# EAGLE board eib-128_panel (EAGLE 6.5.0), part 1 of 6
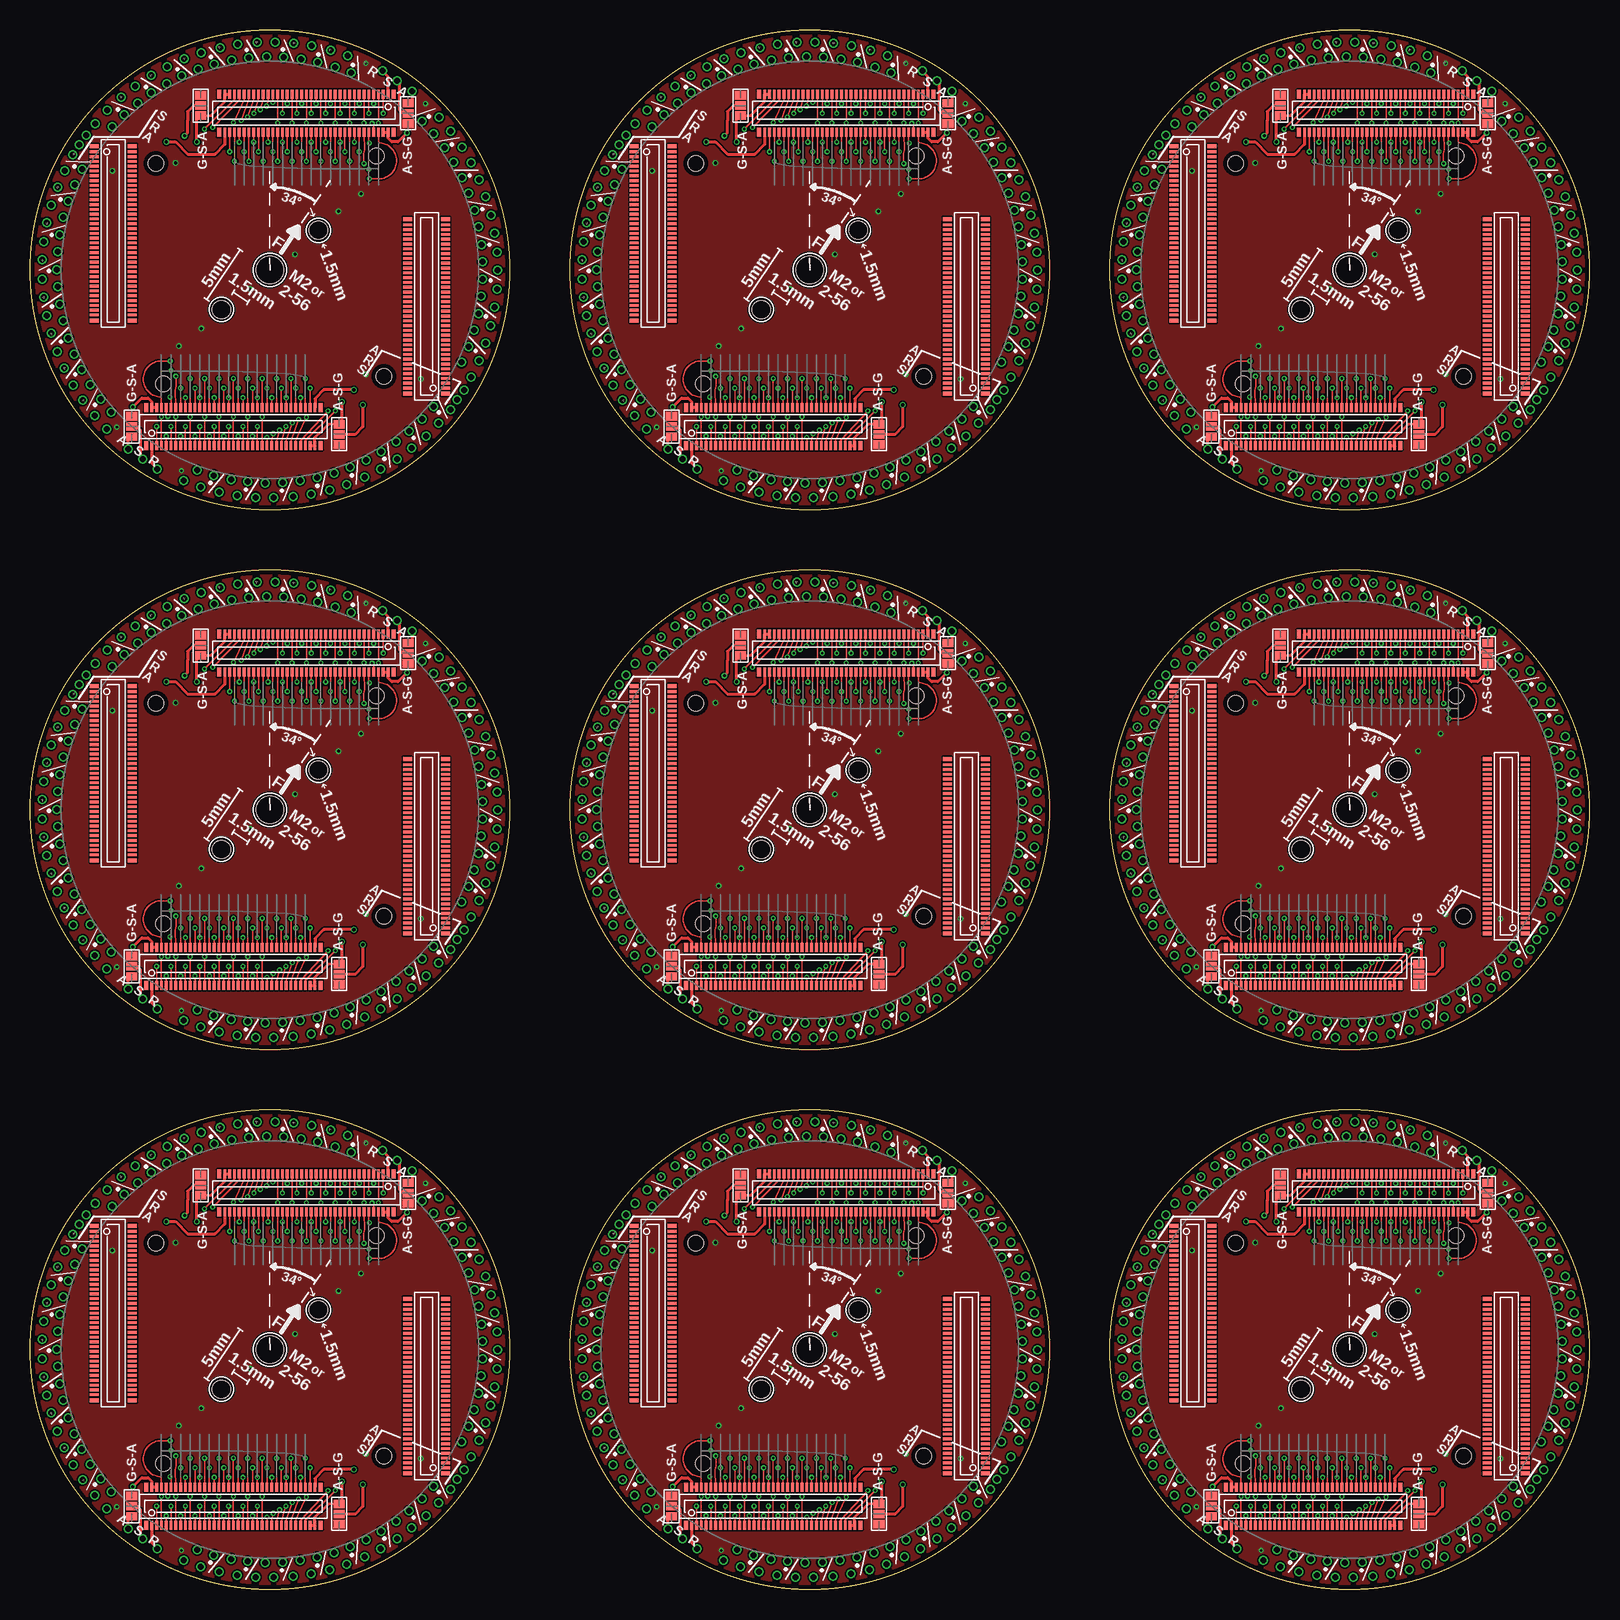
[diagram p0: board, top side]
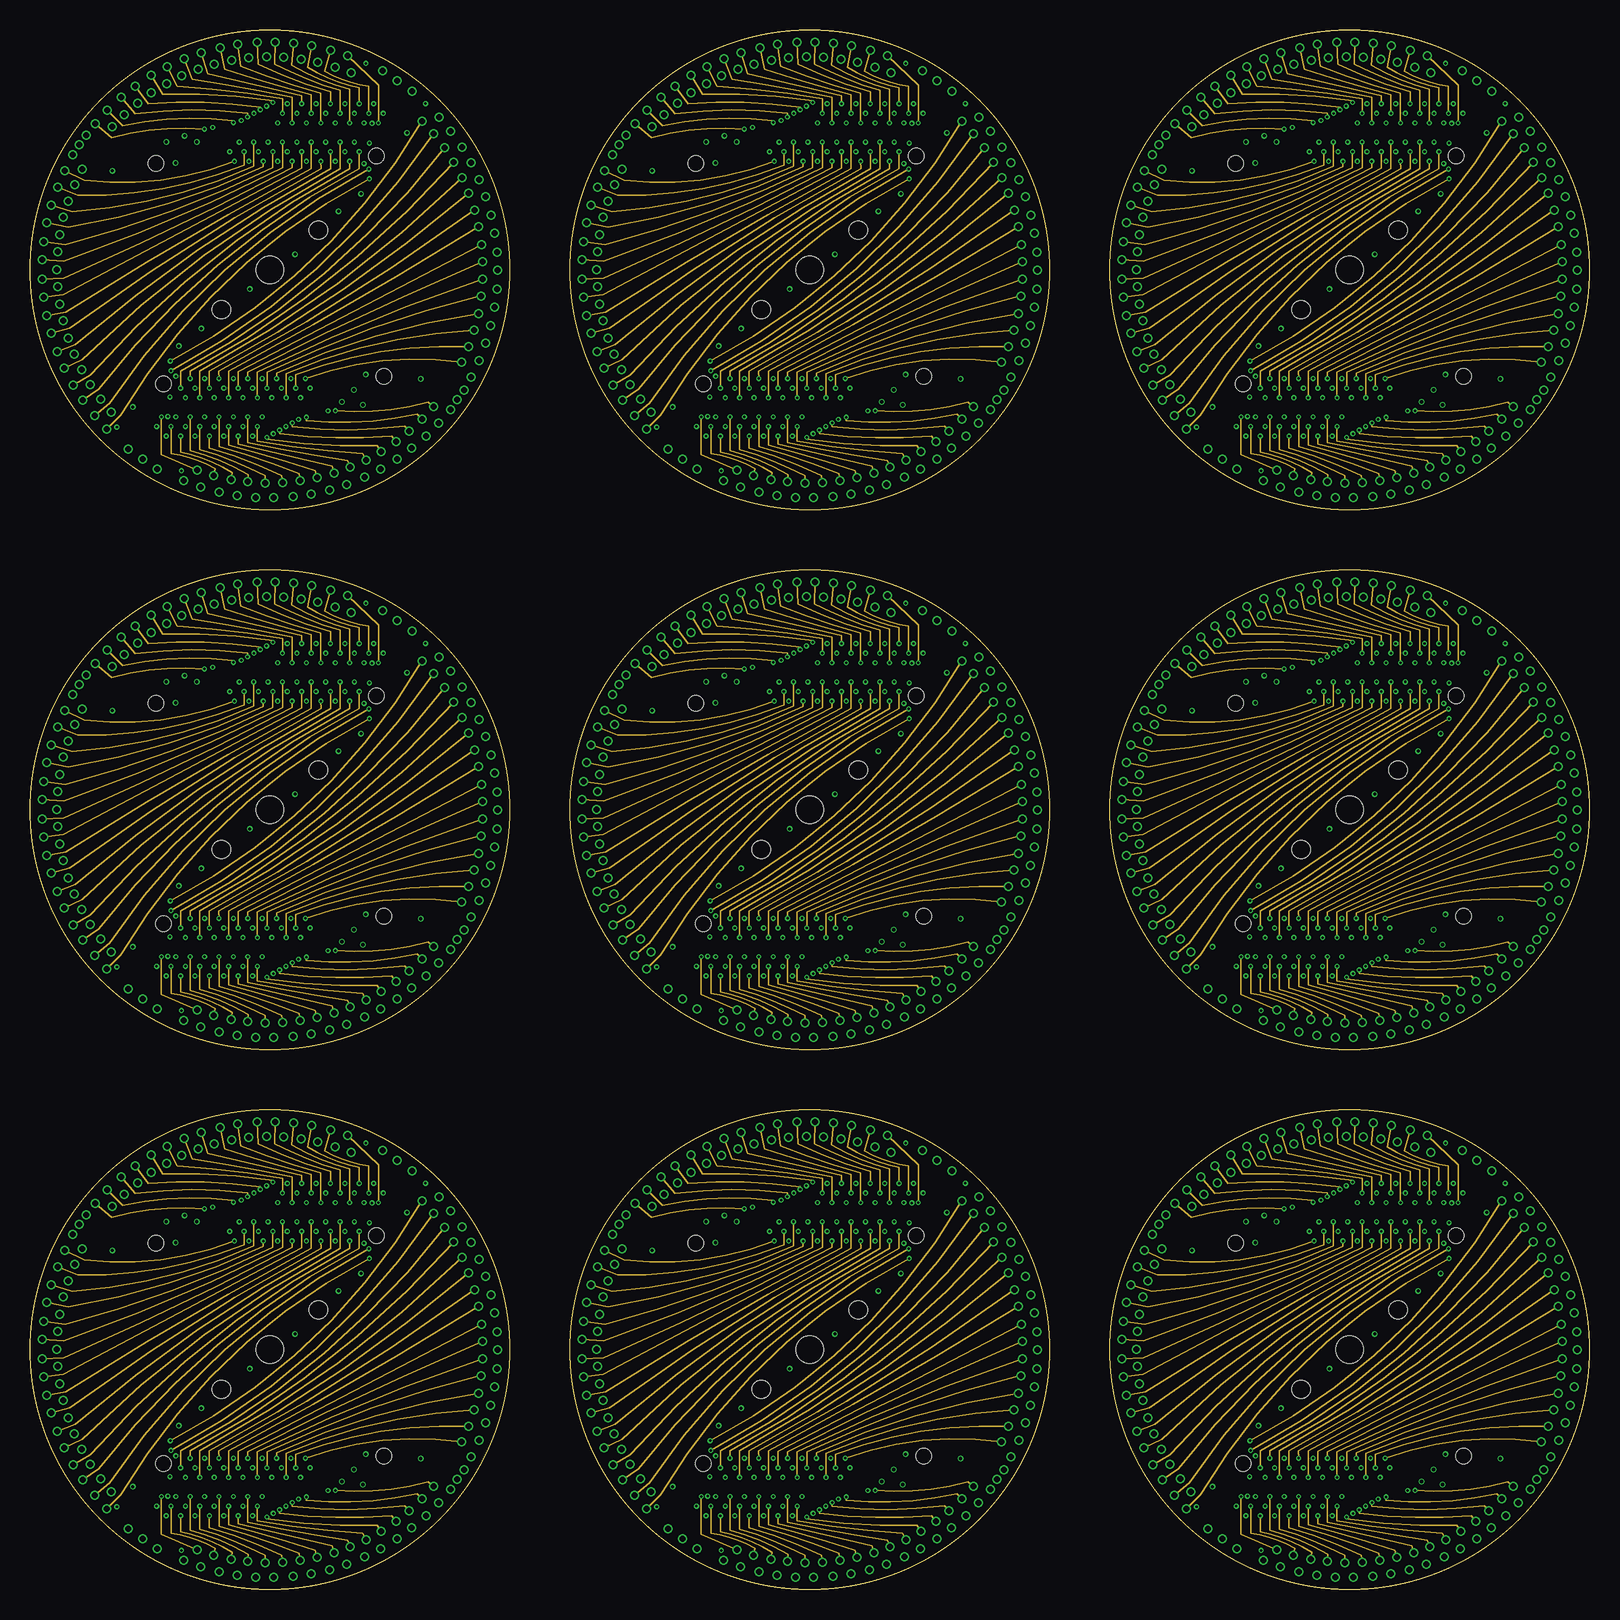
[diagram p1: board, inner layer Route2]
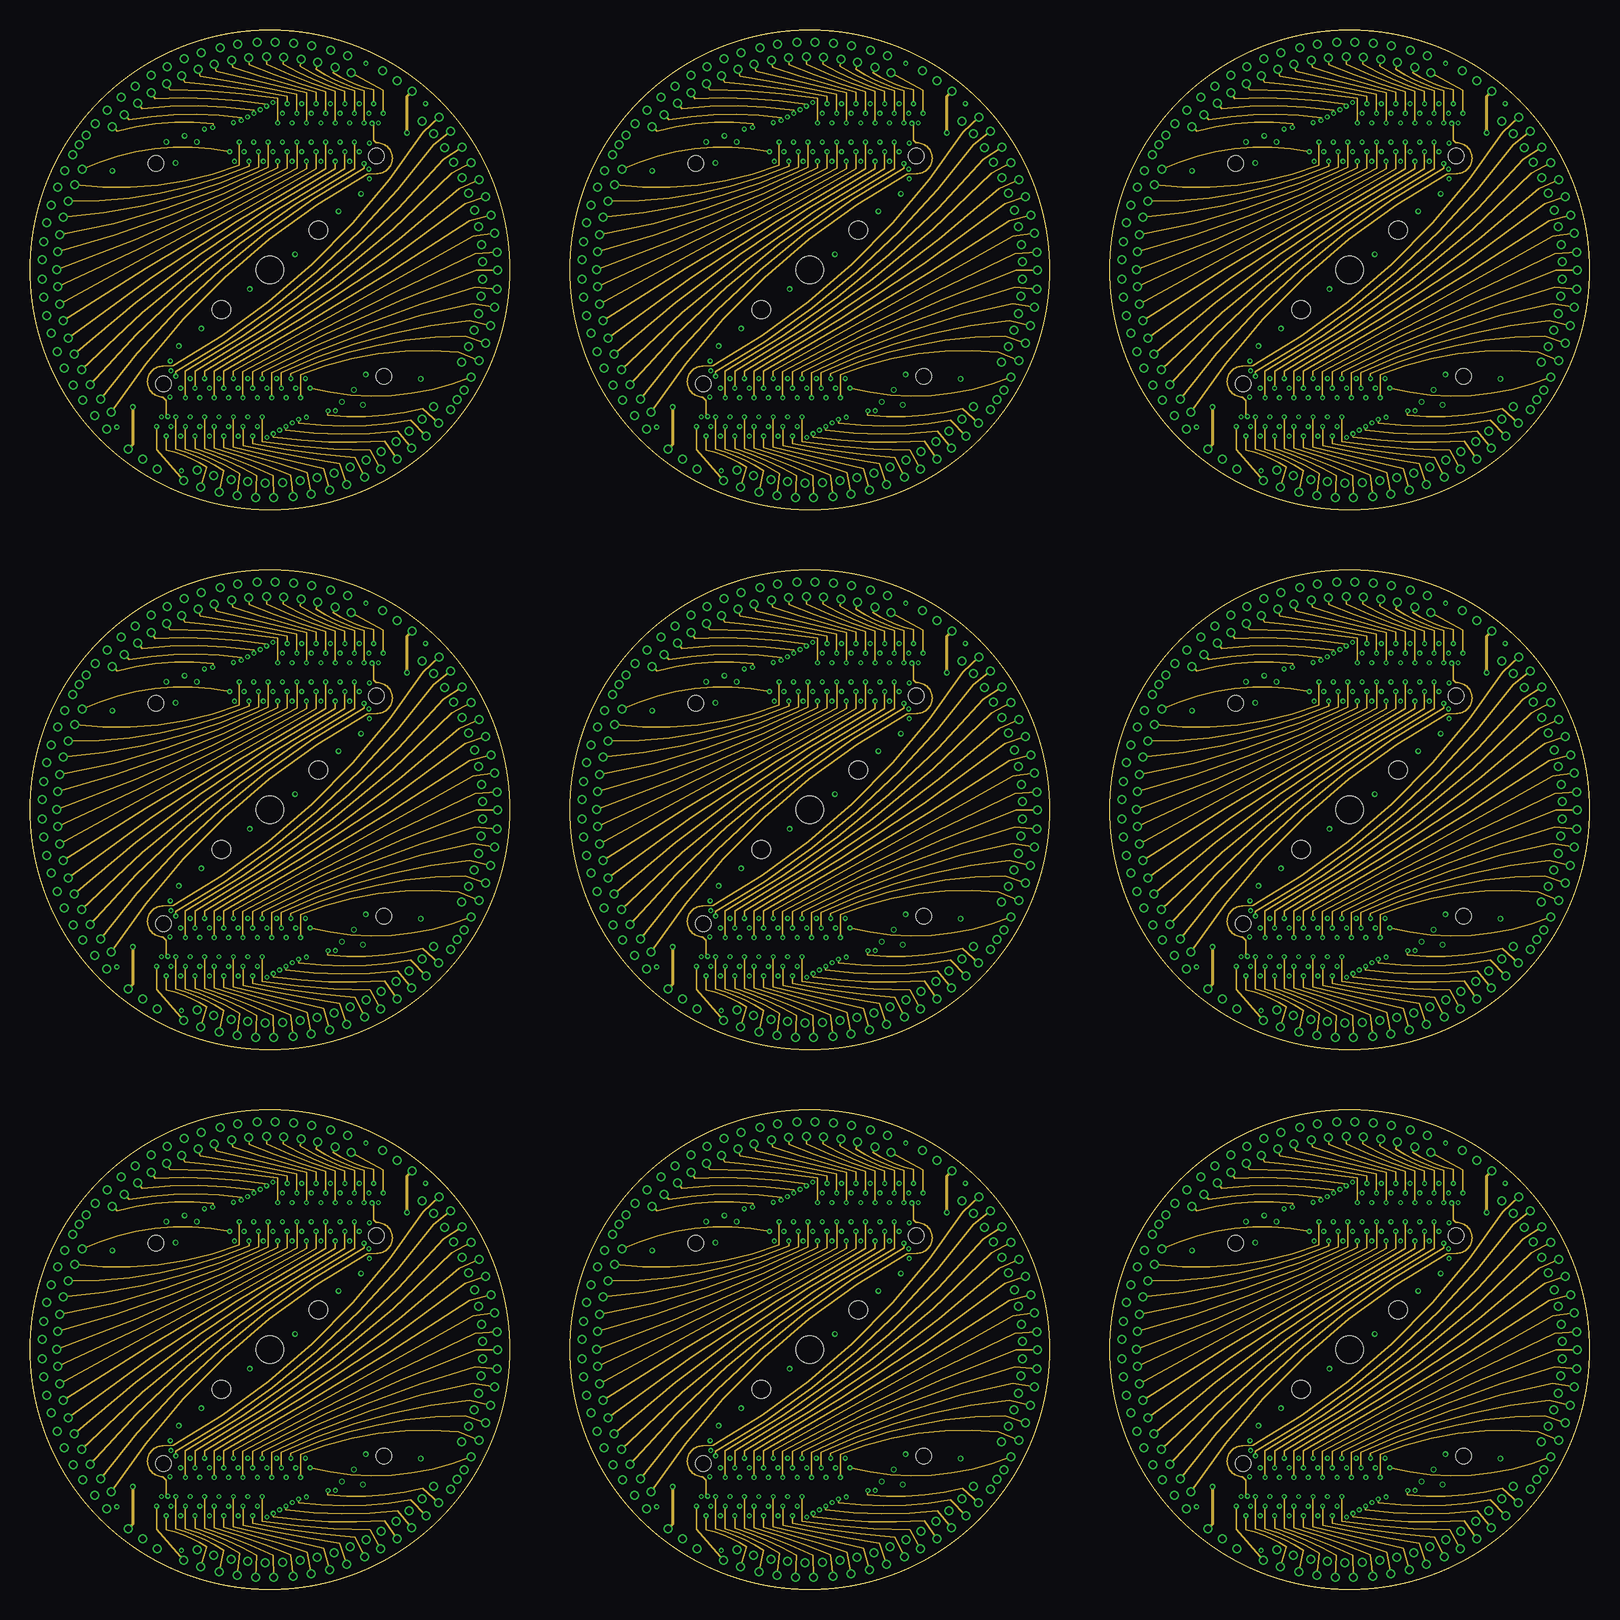
[diagram p2: board, inner layer Route15]
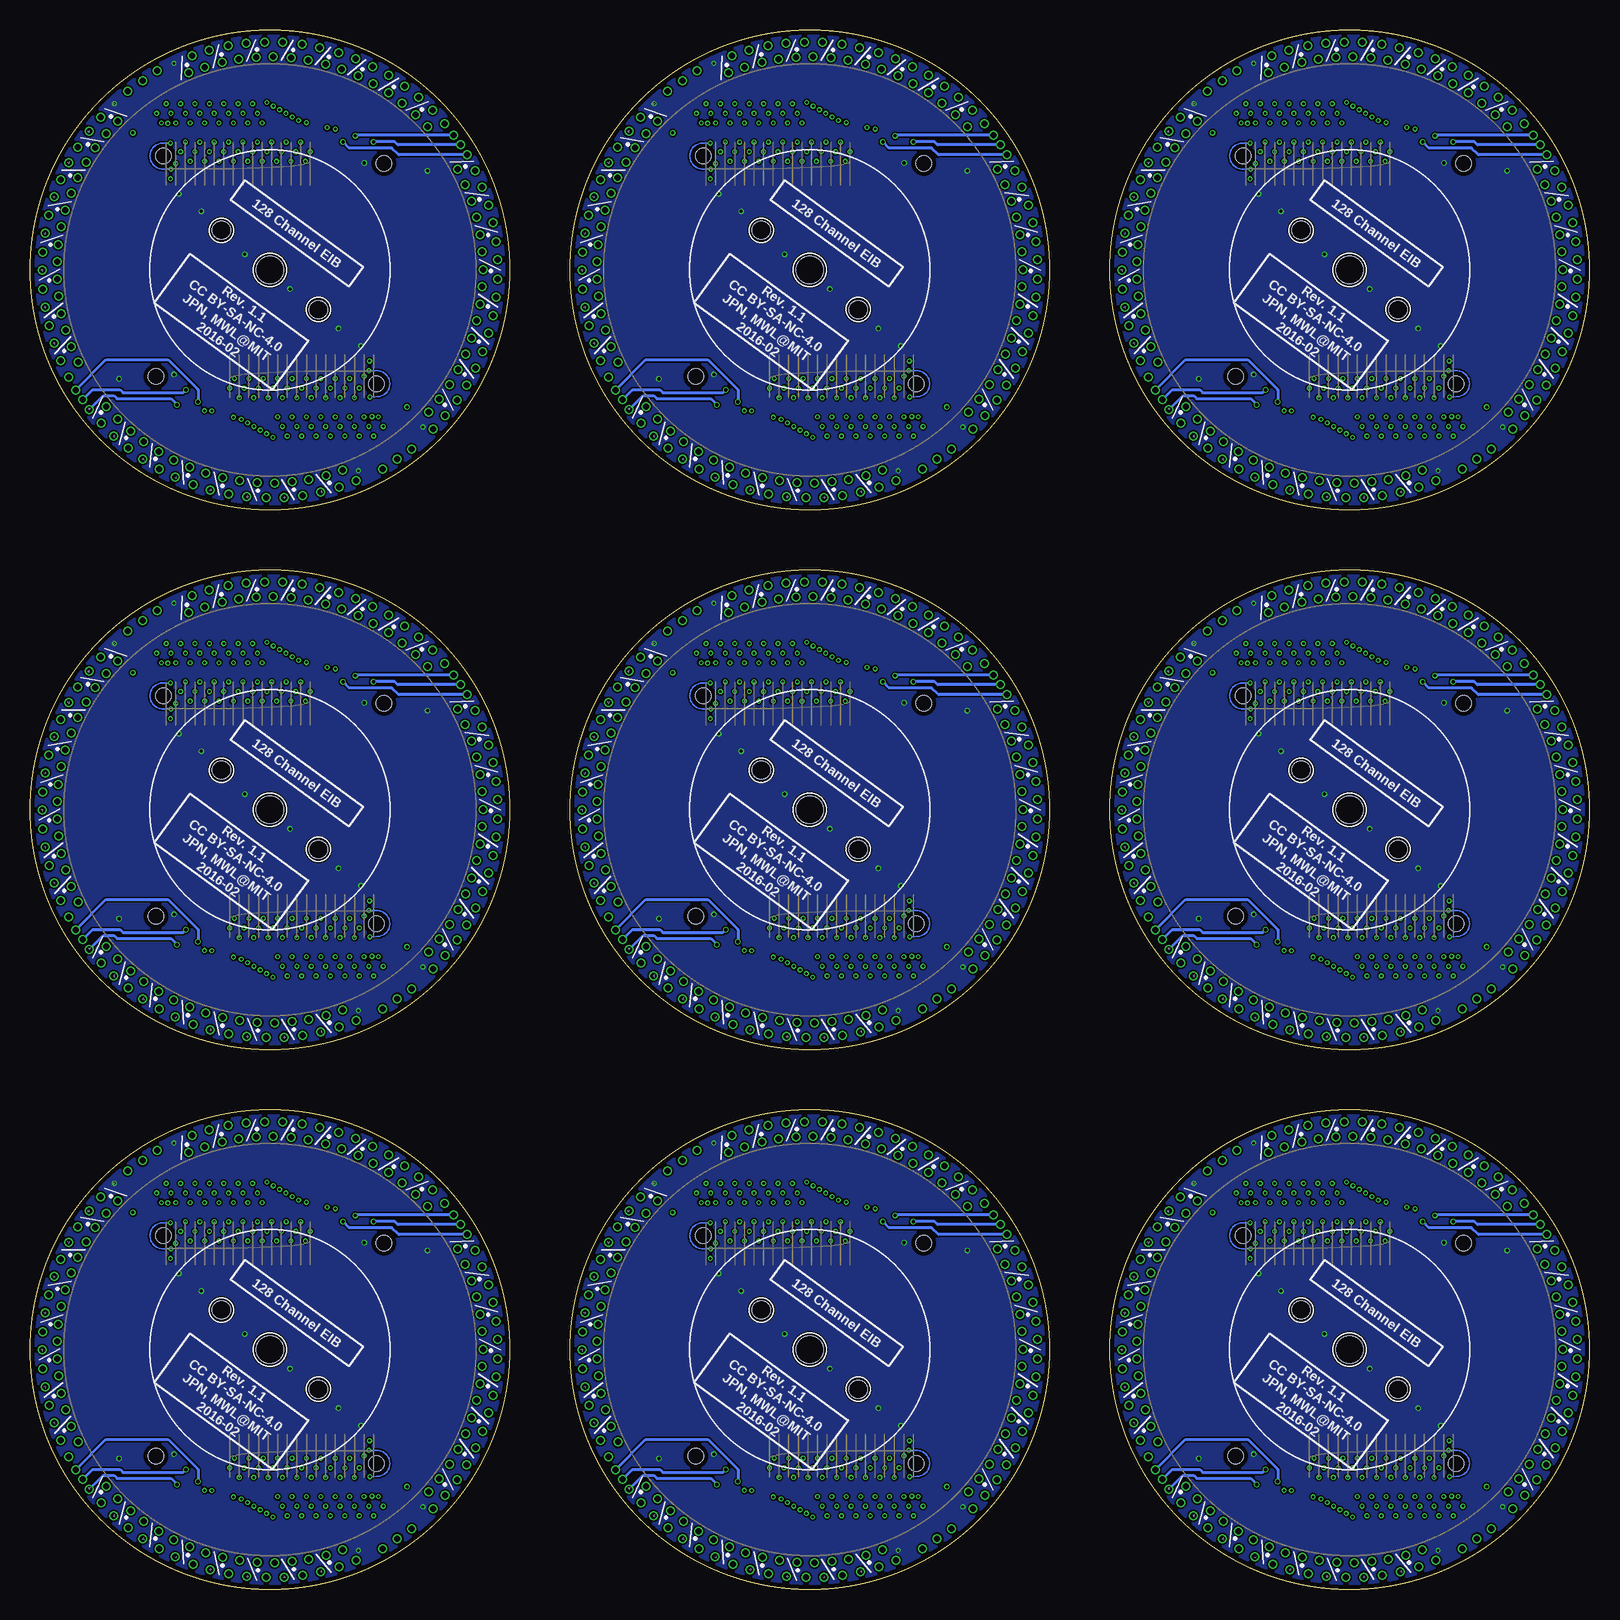
[diagram p3: board, bottom side, seen from below]

Size 130 x 130 mm. Coordinates in mm from the lower left corner, seen from the top.
Outline: circle at 20,20 radius 20
Outline: circle at 20,20 radius 20
Outline: circle at 65,20 radius 20
Outline: circle at 65,20 radius 20
Outline: circle at 110,20 radius 20
Outline: circle at 110,20 radius 20
Outline: circle at 20,65 radius 20
Outline: circle at 20,65 radius 20
Outline: circle at 65,65 radius 20
Outline: circle at 65,65 radius 20
Outline: circle at 110,65 radius 20
Outline: circle at 110,65 radius 20
Outline: circle at 20,110 radius 20
Outline: circle at 20,110 radius 20
Outline: circle at 65,110 radius 20
Outline: circle at 65,110 radius 20
Outline: circle at 110,110 radius 20
Outline: circle at 110,110 radius 20
Copper layers (1*2*15*16): Top 0.035559375mm / dielectric 0.17018125mm / Route2 0.01778125mm / dielectric 47mil / Route15 0.01778125mm / dielectric 0.17018125mm / Bottom 0.035559375mm
Design rules "sierra-circuits-advanced *": minimum track width 5mil, minimum drill 0.0078mm, track to track 5mil, track to pad 5mil, pad to pad 5mil, via to via 5mil, smd to smd 5mil, copper to edge 15mil, drill to drill 5mil, minimum pad ring 4mil, minimum via ring 4mil, stop-mask expansion 4mil, vias tented up to drill 100mil, thermal gap 10mil
Net classes: 1 thick: width 0.102 mm
Holes 1.27 mm at 28.89,29.5 29.5,11.11 11.11,10.5 10.5,28.89 73.89,29.5 74.5,11.11 56.11,10.5 55.5,28.89 118.89,29.5 119.5,11.11 101.11,10.5 100.5,28.89 28.89,74.5 29.5,56.11 11.11,55.5 10.5,73.89 73.89,74.5 74.5,56.11 56.11,55.5 55.5,73.89 118.89,74.5 119.5,56.11 101.11,55.5 100.5,73.89 28.89,119.5 29.5,101.11 11.11,100.5 10.5,118.89 73.89,119.5 74.5,101.11 56.11,100.5 55.5,118.89 118.89,119.5 119.5,101.11 101.11,100.5 100.5,118.89

## Footprints (pad centres in the part's own frame; a part is rotated, then mirrored left to right if it is on the bottom)
GOLDPIN_0.5ID_0.7OD = drill 0.5 pad 0.7: P$1 0,0
DF40-70HEAD-EIB = smd 0.23 x 0.75: 1 -6.8,-1.585; 2 -6.4,-1.585; 3 -6,-1.585; 4 -5.6,-1.585; 5 -5.2,-1.585; 6 -4.8,-1.585; 7 -4.4,-1.585; 8 -4,-1.585; 9 -3.6,-1.585; 10 -3.2,-1.585; 11 -2.8,-1.585; 12 -2.4,-1.585; 13 -2,-1.585; 14 -1.6,-1.585; 15 -1.2,-1.585; 16 -0.8,-1.585; 17 -0.4,-1.585; 18 0,-1.585; 19 0.4,-1.585; 20 0.8,-1.585; 21 1.2,-1.585; 22 1.6,-1.585; 23 2,-1.585; 24 2.4,-1.585; 25 2.8,-1.585; 26 3.2,-1.585; 27 3.6,-1.585; 28 4,-1.585; 29 4.4,-1.585; 30 4.8,-1.585; 31 5.2,-1.585; 32 5.6,-1.585; 33 6,-1.585; 34 6.4,-1.585; 35 6.8,-1.585; 36 6.8,1.585; 37 6.4,1.585; 38 6,1.585; 39 5.6,1.585; 40 5.2,1.585; 41 4.8,1.585; 42 4.4,1.585; 43 4,1.585; 44 3.6,1.585; 45 3.2,1.585; 46 2.8,1.585; 47 2.4,1.585; 48 2,1.585; 49 1.6,1.585; 50 1.2,1.585; 51 0.8,1.585; 52 0.4,1.585; 53 0,1.585; 54 -0.4,1.585; 55 -0.8,1.585; 56 -1.2,1.585; 57 -1.6,1.585; 58 -2,1.585; 59 -2.4,1.585; 60 -2.8,1.585; 61 -3.2,1.585; 62 -3.6,1.585; 63 -4,1.585; 64 -4.4,1.585; 65 -4.8,1.585; 66 -5.2,1.585; 67 -5.6,1.585; 68 -6,1.585; 69 -6.4,1.585; 70 -6.8,1.585 | smd 0.35 x 0.75: M1 -7.275,-1.585; M2 7.275,-1.585; M3 7.275,1.585; M4 -7.275,1.585 | drill 0.2 pad 0.305: P2 -6.4,0; P3 -6,0.8; P4 -5.6,-0.8; P5 -5.2,0; P6 -4.8,0.8; P7 -4.4,-0.8; P8 -4,0; P9 -3.6,0.8; P10 -3.2,-0.8; P11 -2.8,0; P12 -2.4,0.8; P13 -2,-0.8; P14 -1.6,0; P15 -1.2,0.8; P16 -0.8,-0.8; P17 -0.4,0; P18 0,0.8; P19 0.4,-0.8; P20 0.8,0; P21 1.2,0.8; P22 1.6,-0.8; P23 2,0; P24 2.4,0.8; P25 2.8,-0.9; P26 3.327,-0.6; P27 3.854,-0.3; P28 4.381,0; P29 4.908,0.3; P30 5.435,0.6; P31 6.089,0.773; P37 6.4,3.2; P38 6,4; P39 5.6,2.4; P40 5.2,3.2; P41 4.8,4; P42 4.4,2.4; P43 4,3.2; P44 3.6,4; P45 3.2,2.4; P46 2.8,3.2; P47 2.4,4; P48 2,2.4; P49 1.6,3.2; P50 1.2,4; P51 0.8,2.4; P52 0.4,3.2; P53 0,4; P54 -0.4,2.4; P55 -0.8,3.2; P56 -1.2,4; P57 -1.6,2.4; P58 -2,3.2; P59 -2.4,4; P60 -2.8,2.4; P61 -3.2,3.2; P62 -3.6,4; P63 -4,2.4; P64 -4.4,3.2
DF40-70HEAD = smd 0.23 x 0.75: 1 -6.8,-1.585; 2 -6.4,-1.585; 3 -6,-1.585; 4 -5.6,-1.585; 5 -5.2,-1.585; 6 -4.8,-1.585; 7 -4.4,-1.585; 8 -4,-1.585; 9 -3.6,-1.585; 10 -3.2,-1.585; 11 -2.8,-1.585; 12 -2.4,-1.585; 13 -2,-1.585; 14 -1.6,-1.585; 15 -1.2,-1.585; 16 -0.8,-1.585; 17 -0.4,-1.585; 18 0,-1.585; 19 0.4,-1.585; 20 0.8,-1.585; 21 1.2,-1.585; 22 1.6,-1.585; 23 2,-1.585; 24 2.4,-1.585; 25 2.8,-1.585; 26 3.2,-1.585; 27 3.6,-1.585; 28 4,-1.585; 29 4.4,-1.585; 30 4.8,-1.585; 31 5.2,-1.585; 32 5.6,-1.585; 33 6,-1.585; 34 6.4,-1.585; 35 6.8,-1.585; 36 6.8,1.585; 37 6.4,1.585; 38 6,1.585; 39 5.6,1.585; 40 5.2,1.585; 41 4.8,1.585; 42 4.4,1.585; 43 4,1.585; 44 3.6,1.585; 45 3.2,1.585; 46 2.8,1.585; 47 2.4,1.585; 48 2,1.585; 49 1.6,1.585; 50 1.2,1.585; 51 0.8,1.585; 52 0.4,1.585; 53 0,1.585; 54 -0.4,1.585; 55 -0.8,1.585; 56 -1.2,1.585; 57 -1.6,1.585; 58 -2,1.585; 59 -2.4,1.585; 60 -2.8,1.585; 61 -3.2,1.585; 62 -3.6,1.585; 63 -4,1.585; 64 -4.4,1.585; 65 -4.8,1.585; 66 -5.2,1.585; 67 -5.6,1.585; 68 -6,1.585; 69 -6.4,1.585; 70 -6.8,1.585 | smd 0.35 x 0.75: M1 -7.275,-1.585; M2 7.275,-1.585; M3 7.275,1.585; M4 -7.275,1.585
SJ_2_0402 = smd 0.7 x 0.9: 1 -0.838,0; 2 0.838,0; COM 0,0
TETRODE_128_0.5ID_0.7OD = drill 0.5 pad 0.703: 0 0.724,17.743; 1 1.562,18.934; 2 2.14,17.628; 3 3.058,18.748
EIB_MOUNT_A = hole 2.261: 0,0 | hole 1.5: 1.5,5; -1.5,-5

## Placement (x,y rotation side)
AGND_A0  LRG_GP  [GOLDPIN_0.5ID_0.7OD]  31.87,34.91 326 top
AGND_A1  LRG_GP  [GOLDPIN_0.5ID_0.7OD]  3.55,29.59 326 top
AGND_A2  LRG_GP  [GOLDPIN_0.5ID_0.7OD]  48.55,29.59 326 top
AGND_A3  LRG_GP  [GOLDPIN_0.5ID_0.7OD]  76.87,34.91 326 top
AGND_A4  LRG_GP  [GOLDPIN_0.5ID_0.7OD]  93.55,29.59 326 top
AGND_A5  LRG_GP  [GOLDPIN_0.5ID_0.7OD]  121.87,34.91 326 top
AGND_A6  LRG_GP  [GOLDPIN_0.5ID_0.7OD]  3.55,74.59 326 top
AGND_A7  LRG_GP  [GOLDPIN_0.5ID_0.7OD]  31.87,79.91 326 top
AGND_A8  LRG_GP  [GOLDPIN_0.5ID_0.7OD]  48.55,74.59 326 top
AGND_A9  LRG_GP  [GOLDPIN_0.5ID_0.7OD]  76.87,79.91 326 top
AGND_A10  LRG_GP  [GOLDPIN_0.5ID_0.7OD]  93.55,74.59 326 top
AGND_A11  LRG_GP  [GOLDPIN_0.5ID_0.7OD]  121.87,79.91 326 top
AGND_A12  LRG_GP  [GOLDPIN_0.5ID_0.7OD]  3.55,119.59 326 top
AGND_A13  LRG_GP  [GOLDPIN_0.5ID_0.7OD]  31.87,124.91 326 top
AGND_A14  LRG_GP  [GOLDPIN_0.5ID_0.7OD]  48.55,119.59 326 top
AGND_A15  LRG_GP  [GOLDPIN_0.5ID_0.7OD]  76.87,124.91 326 top
AGND_A16  LRG_GP  [GOLDPIN_0.5ID_0.7OD]  93.55,119.59 326 top
AGND_A17  LRG_GP  [GOLDPIN_0.5ID_0.7OD]  121.87,124.91 326 top
AGND_B0  LRG_GP  [GOLDPIN_0.5ID_0.7OD]  8.17,5.06 0 top
AGND_B1  LRG_GP  [GOLDPIN_0.5ID_0.7OD]  36.17,10 0 top
AGND_B2  LRG_GP  [GOLDPIN_0.5ID_0.7OD]  53.17,5.06 0 top
AGND_B3  LRG_GP  [GOLDPIN_0.5ID_0.7OD]  81.17,10 0 top
AGND_B4  LRG_GP  [GOLDPIN_0.5ID_0.7OD]  98.17,5.06 0 top
AGND_B5  LRG_GP  [GOLDPIN_0.5ID_0.7OD]  126.17,10 0 top
AGND_B6  LRG_GP  [GOLDPIN_0.5ID_0.7OD]  8.17,50.06 0 top
AGND_B7  LRG_GP  [GOLDPIN_0.5ID_0.7OD]  36.17,55 0 top
AGND_B8  LRG_GP  [GOLDPIN_0.5ID_0.7OD]  53.17,50.06 0 top
AGND_B9  LRG_GP  [GOLDPIN_0.5ID_0.7OD]  81.17,55 0 top
AGND_B10  LRG_GP  [GOLDPIN_0.5ID_0.7OD]  98.17,50.06 0 top
AGND_B11  LRG_GP  [GOLDPIN_0.5ID_0.7OD]  126.17,55 0 top
AGND_B12  LRG_GP  [GOLDPIN_0.5ID_0.7OD]  8.17,95.06 0 top
AGND_B13  LRG_GP  [GOLDPIN_0.5ID_0.7OD]  36.17,100 0 top
AGND_B14  LRG_GP  [GOLDPIN_0.5ID_0.7OD]  53.17,95.06 0 top
AGND_B15  LRG_GP  [GOLDPIN_0.5ID_0.7OD]  81.17,100 0 top
AGND_B16  LRG_GP  [GOLDPIN_0.5ID_0.7OD]  98.17,95.06 0 top
AGND_B17  LRG_GP  [GOLDPIN_0.5ID_0.7OD]  126.17,100 0 top
AIN_N0T  DF40HEAD  [DF40-70HEAD-EIB]  23.05,33.06 180 top
AIN_N0T1  DF40HEAD  [DF40-70HEAD-EIB]  68.05,33.06 180 top
AIN_N0T2  DF40HEAD  [DF40-70HEAD-EIB]  113.05,33.06 180 top
AIN_N0T3  DF40HEAD  [DF40-70HEAD-EIB]  23.05,78.06 180 top
AIN_N0T4  DF40HEAD  [DF40-70HEAD-EIB]  68.05,78.06 180 top
AIN_N0T5  DF40HEAD  [DF40-70HEAD-EIB]  113.05,78.06 180 top
AIN_N0T6  DF40HEAD  [DF40-70HEAD-EIB]  23.05,123.06 180 top
AIN_N0T7  DF40HEAD  [DF40-70HEAD-EIB]  68.05,123.06 180 top
AIN_N0T8  DF40HEAD  [DF40-70HEAD-EIB]  113.05,123.06 180 top
AIN_S0T  DF40HEAD  [DF40-70HEAD-EIB]  16.95,6.94 0 top
AIN_S0T1  DF40HEAD  [DF40-70HEAD-EIB]  61.95,6.94 0 top
AIN_S0T2  DF40HEAD  [DF40-70HEAD-EIB]  106.95,6.94 0 top
AIN_S0T3  DF40HEAD  [DF40-70HEAD-EIB]  16.95,51.94 0 top
AIN_S0T4  DF40HEAD  [DF40-70HEAD-EIB]  61.95,51.94 0 top
AIN_S0T5  DF40HEAD  [DF40-70HEAD-EIB]  106.95,51.94 0 top
AIN_S0T6  DF40HEAD  [DF40-70HEAD-EIB]  16.95,96.94 0 top
AIN_S0T7  DF40HEAD  [DF40-70HEAD-EIB]  61.95,96.94 0 top
AIN_S0T8  DF40HEAD  [DF40-70HEAD-EIB]  106.95,96.94 0 top
MECH_E0T  DF40HEAD  [DF40-70HEAD]  33.06,16.95 90 top
MECH_E0T1  DF40HEAD  [DF40-70HEAD]  78.06,16.95 90 top
MECH_E0T2  DF40HEAD  [DF40-70HEAD]  123.06,16.95 90 top
MECH_E0T3  DF40HEAD  [DF40-70HEAD]  33.06,61.95 90 top
MECH_E0T4  DF40HEAD  [DF40-70HEAD]  78.06,61.95 90 top
MECH_E0T5  DF40HEAD  [DF40-70HEAD]  123.06,61.95 90 top
MECH_E0T6  DF40HEAD  [DF40-70HEAD]  33.06,106.95 90 top
MECH_E0T7  DF40HEAD  [DF40-70HEAD]  78.06,106.95 90 top
MECH_E0T8  DF40HEAD  [DF40-70HEAD]  123.06,106.95 90 top
MECH_W0T  DF40HEAD  [DF40-70HEAD]  6.94,23.05 270 top
MECH_W0T1  DF40HEAD  [DF40-70HEAD]  51.94,23.05 270 top
MECH_W0T2  DF40HEAD  [DF40-70HEAD]  96.94,23.05 270 top
MECH_W0T3  DF40HEAD  [DF40-70HEAD]  6.94,68.05 270 top
MECH_W0T4  DF40HEAD  [DF40-70HEAD]  51.94,68.05 270 top
MECH_W0T5  DF40HEAD  [DF40-70HEAD]  96.94,68.05 270 top
MECH_W0T6  DF40HEAD  [DF40-70HEAD]  6.94,113.05 270 top
MECH_W0T7  DF40HEAD  [DF40-70HEAD]  51.94,113.05 270 top
MECH_W0T8  DF40HEAD  [DF40-70HEAD]  96.94,113.05 270 top
REF_A0  LRG_GP  [GOLDPIN_0.5ID_0.7OD]  29.38,36.59 326 top
REF_A1  LRG_GP  [GOLDPIN_0.5ID_0.7OD]  4.11,30.42 326 top
REF_A2  LRG_GP  [GOLDPIN_0.5ID_0.7OD]  74.38,36.59 326 top
REF_A3  LRG_GP  [GOLDPIN_0.5ID_0.7OD]  49.11,30.42 326 top
REF_A4  LRG_GP  [GOLDPIN_0.5ID_0.7OD]  119.38,36.59 326 top
REF_A5  LRG_GP  [GOLDPIN_0.5ID_0.7OD]  94.11,30.42 326 top
REF_A6  LRG_GP  [GOLDPIN_0.5ID_0.7OD]  29.38,81.59 326 top
REF_A7  LRG_GP  [GOLDPIN_0.5ID_0.7OD]  4.11,75.42 326 top
REF_A8  LRG_GP  [GOLDPIN_0.5ID_0.7OD]  74.38,81.59 326 top
REF_A9  LRG_GP  [GOLDPIN_0.5ID_0.7OD]  49.11,75.42 326 top
REF_A10  LRG_GP  [GOLDPIN_0.5ID_0.7OD]  119.38,81.59 326 top
REF_A11  LRG_GP  [GOLDPIN_0.5ID_0.7OD]  94.11,75.42 326 top
REF_A12  LRG_GP  [GOLDPIN_0.5ID_0.7OD]  29.38,126.59 326 top
REF_A13  LRG_GP  [GOLDPIN_0.5ID_0.7OD]  4.11,120.42 326 top
REF_A14  LRG_GP  [GOLDPIN_0.5ID_0.7OD]  74.38,126.59 326 top
REF_A15  LRG_GP  [GOLDPIN_0.5ID_0.7OD]  49.11,120.42 326 top
REF_A16  LRG_GP  [GOLDPIN_0.5ID_0.7OD]  119.38,126.59 326 top
REF_A17  LRG_GP  [GOLDPIN_0.5ID_0.7OD]  94.11,120.42 326 top
REF_B0  LRG_GP  [GOLDPIN_0.5ID_0.7OD]  10.62,3.41 0 top
REF_B1  LRG_GP  [GOLDPIN_0.5ID_0.7OD]  35.61,9.17 0 top
REF_B2  LRG_GP  [GOLDPIN_0.5ID_0.7OD]  80.61,9.17 0 top
REF_B3  LRG_GP  [GOLDPIN_0.5ID_0.7OD]  55.62,3.41 0 top
REF_B4  LRG_GP  [GOLDPIN_0.5ID_0.7OD]  125.61,9.17 0 top
REF_B5  LRG_GP  [GOLDPIN_0.5ID_0.7OD]  100.62,3.41 0 top
REF_B6  LRG_GP  [GOLDPIN_0.5ID_0.7OD]  35.61,54.17 0 top
REF_B7  LRG_GP  [GOLDPIN_0.5ID_0.7OD]  10.62,48.41 0 top
REF_B8  LRG_GP  [GOLDPIN_0.5ID_0.7OD]  80.61,54.17 0 top
REF_B9  LRG_GP  [GOLDPIN_0.5ID_0.7OD]  55.62,48.41 0 top
REF_B10  LRG_GP  [GOLDPIN_0.5ID_0.7OD]  125.61,54.17 0 top
REF_B11  LRG_GP  [GOLDPIN_0.5ID_0.7OD]  100.62,48.41 0 top
REF_B12  LRG_GP  [GOLDPIN_0.5ID_0.7OD]  35.61,99.17 0 top
REF_B13  LRG_GP  [GOLDPIN_0.5ID_0.7OD]  10.62,93.41 0 top
REF_B14  LRG_GP  [GOLDPIN_0.5ID_0.7OD]  80.61,99.17 0 top
REF_B15  LRG_GP  [GOLDPIN_0.5ID_0.7OD]  55.62,93.41 0 top
REF_B16  LRG_GP  [GOLDPIN_0.5ID_0.7OD]  125.61,99.17 0 top
REF_B17  LRG_GP  [GOLDPIN_0.5ID_0.7OD]  100.62,93.41 0 top
SHLD_A0  LRG_GP  [GOLDPIN_0.5ID_0.7OD]  30.62,35.75 326 top
SHLD_A1  LRG_GP  [GOLDPIN_0.5ID_0.7OD]  4.67,31.25 326 top
SHLD_A2  LRG_GP  [GOLDPIN_0.5ID_0.7OD]  75.62,35.75 326 top
SHLD_A3  LRG_GP  [GOLDPIN_0.5ID_0.7OD]  49.67,31.25 326 top
SHLD_A4  LRG_GP  [GOLDPIN_0.5ID_0.7OD]  120.62,35.75 326 top
SHLD_A5  LRG_GP  [GOLDPIN_0.5ID_0.7OD]  94.67,31.25 326 top
SHLD_A6  LRG_GP  [GOLDPIN_0.5ID_0.7OD]  30.62,80.75 326 top
SHLD_A7  LRG_GP  [GOLDPIN_0.5ID_0.7OD]  4.67,76.25 326 top
SHLD_A8  LRG_GP  [GOLDPIN_0.5ID_0.7OD]  75.62,80.75 326 top
SHLD_A9  LRG_GP  [GOLDPIN_0.5ID_0.7OD]  49.67,76.25 326 top
SHLD_A10  LRG_GP  [GOLDPIN_0.5ID_0.7OD]  120.62,80.75 326 top
SHLD_A11  LRG_GP  [GOLDPIN_0.5ID_0.7OD]  94.67,76.25 326 top
SHLD_A12  LRG_GP  [GOLDPIN_0.5ID_0.7OD]  30.62,125.75 326 top
SHLD_A13  LRG_GP  [GOLDPIN_0.5ID_0.7OD]  4.67,121.25 326 top
SHLD_A14  LRG_GP  [GOLDPIN_0.5ID_0.7OD]  75.62,125.75 326 top
SHLD_A15  LRG_GP  [GOLDPIN_0.5ID_0.7OD]  49.67,121.25 326 top
SHLD_A16  LRG_GP  [GOLDPIN_0.5ID_0.7OD]  120.62,125.75 326 top
SHLD_A17  LRG_GP  [GOLDPIN_0.5ID_0.7OD]  94.67,121.25 326 top
SHLD_B0  LRG_GP  [GOLDPIN_0.5ID_0.7OD]  9.38,4.25 0 top
SHLD_B1  LRG_GP  [GOLDPIN_0.5ID_0.7OD]  35.05,8.34 0 top
SHLD_B2  LRG_GP  [GOLDPIN_0.5ID_0.7OD]  54.38,4.25 0 top
SHLD_B3  LRG_GP  [GOLDPIN_0.5ID_0.7OD]  80.05,8.34 0 top
SHLD_B4  LRG_GP  [GOLDPIN_0.5ID_0.7OD]  99.38,4.25 0 top
SHLD_B5  LRG_GP  [GOLDPIN_0.5ID_0.7OD]  125.05,8.34 0 top
SHLD_B6  LRG_GP  [GOLDPIN_0.5ID_0.7OD]  9.38,49.25 0 top
SHLD_B7  LRG_GP  [GOLDPIN_0.5ID_0.7OD]  35.05,53.34 0 top
SHLD_B8  LRG_GP  [GOLDPIN_0.5ID_0.7OD]  54.38,49.25 0 top
SHLD_B9  LRG_GP  [GOLDPIN_0.5ID_0.7OD]  80.05,53.34 0 top
SHLD_B10  LRG_GP  [GOLDPIN_0.5ID_0.7OD]  99.38,49.25 0 top
SHLD_B11  LRG_GP  [GOLDPIN_0.5ID_0.7OD]  125.05,53.34 0 top
SHLD_B12  LRG_GP  [GOLDPIN_0.5ID_0.7OD]  9.38,94.25 0 top
SHLD_B13  LRG_GP  [GOLDPIN_0.5ID_0.7OD]  35.05,98.34 0 top
SHLD_B14  LRG_GP  [GOLDPIN_0.5ID_0.7OD]  54.38,94.25 0 top
SHLD_B15  LRG_GP  [GOLDPIN_0.5ID_0.7OD]  80.05,98.34 0 top
SHLD_B16  LRG_GP  [GOLDPIN_0.5ID_0.7OD]  99.38,94.25 0 top
SHLD_B17  LRG_GP  [GOLDPIN_0.5ID_0.7OD]  125.05,98.34 0 top
SJ_A0  [SJ_2_0402]  31.53,33.06 90 top
SJ_A1  [SJ_2_0402]  14.23,33.7 270 top
SJ_A2  [SJ_2_0402]  76.53,33.06 90 top
SJ_A3  [SJ_2_0402]  59.23,33.7 270 top
SJ_A4  [SJ_2_0402]  121.53,33.06 90 top
SJ_A5  [SJ_2_0402]  104.23,33.7 270 top
SJ_A6  [SJ_2_0402]  31.53,78.06 90 top
SJ_A7  [SJ_2_0402]  14.23,78.7 270 top
SJ_A8  [SJ_2_0402]  76.53,78.06 90 top
SJ_A9  [SJ_2_0402]  59.23,78.7 270 top
SJ_A10  [SJ_2_0402]  121.53,78.06 90 top
SJ_A11  [SJ_2_0402]  104.23,78.7 270 top
SJ_A12  [SJ_2_0402]  31.53,123.06 90 top
SJ_A13  [SJ_2_0402]  14.23,123.7 270 top
SJ_A14  [SJ_2_0402]  76.53,123.06 90 top
SJ_A15  [SJ_2_0402]  59.23,123.7 270 top
SJ_A16  [SJ_2_0402]  121.53,123.06 90 top
SJ_A17  [SJ_2_0402]  104.23,123.7 270 top
SJ_B0  [SJ_2_0402]  8.47,6.94 270 top
SJ_B1  [SJ_2_0402]  25.77,6.3 90 top
SJ_B2  [SJ_2_0402]  53.47,6.94 270 top
SJ_B3  [SJ_2_0402]  70.77,6.3 90 top
SJ_B4  [SJ_2_0402]  98.47,6.94 270 top
SJ_B5  [SJ_2_0402]  115.77,6.3 90 top
SJ_B6  [SJ_2_0402]  8.47,51.94 270 top
SJ_B7  [SJ_2_0402]  25.77,51.3 90 top
SJ_B8  [SJ_2_0402]  53.47,51.94 270 top
SJ_B9  [SJ_2_0402]  70.77,51.3 90 top
SJ_B10  [SJ_2_0402]  98.47,51.94 270 top
SJ_B11  [SJ_2_0402]  115.77,51.3 90 top
SJ_B12  [SJ_2_0402]  8.47,96.94 270 top
SJ_B13  [SJ_2_0402]  25.77,96.3 90 top
SJ_B14  [SJ_2_0402]  53.47,96.94 270 top
SJ_B15  [SJ_2_0402]  70.77,96.3 90 top
SJ_B16  [SJ_2_0402]  98.47,96.94 270 top
SJ_B17  [SJ_2_0402]  115.77,96.3 90 top
TET0  0  [TETRODE_128_0.5ID_0.7OD]  20,20 24.7 bottom
TET1  1  [TETRODE_128_0.5ID_0.7OD]  20,20 15.3 bottom
TET2  2  [TETRODE_128_0.5ID_0.7OD]  20,20 6 bottom
TET3  3  [TETRODE_128_0.5ID_0.7OD]  20,20 356.6 bottom
TET4  4  [TETRODE_128_0.5ID_0.7OD]  20,20 347.2 bottom
TET5  5  [TETRODE_128_0.5ID_0.7OD]  20,20 337.9 bottom
TET6  6  [TETRODE_128_0.5ID_0.7OD]  20,20 328.5 bottom
TET7  7  [TETRODE_128_0.5ID_0.7OD]  20,20 319.2 bottom
TET8  8  [TETRODE_128_0.5ID_0.7OD]  20,20 300.5 bottom
TET9  9  [TETRODE_128_0.5ID_0.7OD]  20,20 291.2 bottom
TET10  10  [TETRODE_128_0.5ID_0.7OD]  20,20 281.8 bottom
TET11  11  [TETRODE_128_0.5ID_0.7OD]  20,20 272.4 bottom
TET12  12  [TETRODE_128_0.5ID_0.7OD]  20,20 263.1 bottom
TET13  13  [TETRODE_128_0.5ID_0.7OD]  20,20 253.7 bottom
TET14  14  [TETRODE_128_0.5ID_0.7OD]  20,20 244.4 bottom
TET15  15  [TETRODE_128_0.5ID_0.7OD]  20,20 235 bottom
TET16  16  [TETRODE_128_0.5ID_0.7OD]  20,20 167 top
TET17  17  [TETRODE_128_0.5ID_0.7OD]  20,20 176.4 top
TET18  18  [TETRODE_128_0.5ID_0.7OD]  20,20 185.7 top
TET19  19  [TETRODE_128_0.5ID_0.7OD]  20,20 195.1 top
TET20  20  [TETRODE_128_0.5ID_0.7OD]  20,20 204.4 top
TET21  21  [TETRODE_128_0.5ID_0.7OD]  20,20 213.8 top
TET22  22  [TETRODE_128_0.5ID_0.7OD]  20,20 223.2 top
TET23  23  [TETRODE_128_0.5ID_0.7OD]  20,20 232.5 top
TET24  24  [TETRODE_128_0.5ID_0.7OD]  20,20 251.2 top
TET25  25  [TETRODE_128_0.5ID_0.7OD]  20,20 260.5 top
TET26  26  [TETRODE_128_0.5ID_0.7OD]  20,20 269.9 top
TET27  27  [TETRODE_128_0.5ID_0.7OD]  20,20 279.2 top
TET28  28  [TETRODE_128_0.5ID_0.7OD]  20,20 288.6 top
TET29  29  [TETRODE_128_0.5ID_0.7OD]  20,20 298 top
TET30  30  [TETRODE_128_0.5ID_0.7OD]  20,20 307.3 top
TET31  31  [TETRODE_128_0.5ID_0.7OD]  20,20 316.7 top
TET32  0  [TETRODE_128_0.5ID_0.7OD]  65,20 24.7 bottom
TET33  1  [TETRODE_128_0.5ID_0.7OD]  65,20 15.3 bottom
TET34  2  [TETRODE_128_0.5ID_0.7OD]  65,20 6 bottom
TET35  3  [TETRODE_128_0.5ID_0.7OD]  65,20 356.6 bottom
TET36  4  [TETRODE_128_0.5ID_0.7OD]  65,20 347.2 bottom
TET37  5  [TETRODE_128_0.5ID_0.7OD]  65,20 337.9 bottom
TET38  6  [TETRODE_128_0.5ID_0.7OD]  65,20 328.5 bottom
TET39  7  [TETRODE_128_0.5ID_0.7OD]  65,20 319.2 bottom
TET40  8  [TETRODE_128_0.5ID_0.7OD]  65,20 300.5 bottom
TET41  9  [TETRODE_128_0.5ID_0.7OD]  65,20 291.2 bottom
TET42  10  [TETRODE_128_0.5ID_0.7OD]  65,20 281.8 bottom
TET43  11  [TETRODE_128_0.5ID_0.7OD]  65,20 272.4 bottom
TET44  12  [TETRODE_128_0.5ID_0.7OD]  65,20 263.1 bottom
TET45  13  [TETRODE_128_0.5ID_0.7OD]  65,20 253.7 bottom
TET46  14  [TETRODE_128_0.5ID_0.7OD]  65,20 244.4 bottom
TET47  15  [TETRODE_128_0.5ID_0.7OD]  65,20 235 bottom
TET48  16  [TETRODE_128_0.5ID_0.7OD]  65,20 167 top
TET49  17  [TETRODE_128_0.5ID_0.7OD]  65,20 176.4 top
TET50  18  [TETRODE_128_0.5ID_0.7OD]  65,20 185.7 top
TET51  19  [TETRODE_128_0.5ID_0.7OD]  65,20 195.1 top
TET52  20  [TETRODE_128_0.5ID_0.7OD]  65,20 204.4 top
TET53  21  [TETRODE_128_0.5ID_0.7OD]  65,20 213.8 top
TET54  22  [TETRODE_128_0.5ID_0.7OD]  65,20 223.2 top
TET55  23  [TETRODE_128_0.5ID_0.7OD]  65,20 232.5 top
TET56  24  [TETRODE_128_0.5ID_0.7OD]  65,20 251.2 top
TET57  25  [TETRODE_128_0.5ID_0.7OD]  65,20 260.5 top
TET58  26  [TETRODE_128_0.5ID_0.7OD]  65,20 269.9 top
TET59  27  [TETRODE_128_0.5ID_0.7OD]  65,20 279.2 top
TET60  28  [TETRODE_128_0.5ID_0.7OD]  65,20 288.6 top
TET61  29  [TETRODE_128_0.5ID_0.7OD]  65,20 298 top
TET62  30  [TETRODE_128_0.5ID_0.7OD]  65,20 307.3 top
TET63  31  [TETRODE_128_0.5ID_0.7OD]  65,20 316.7 top
TET64  0  [TETRODE_128_0.5ID_0.7OD]  110,20 24.7 bottom
TET65  1  [TETRODE_128_0.5ID_0.7OD]  110,20 15.3 bottom
TET66  2  [TETRODE_128_0.5ID_0.7OD]  110,20 6 bottom
TET67  3  [TETRODE_128_0.5ID_0.7OD]  110,20 356.6 bottom
TET68  4  [TETRODE_128_0.5ID_0.7OD]  110,20 347.2 bottom
TET69  5  [TETRODE_128_0.5ID_0.7OD]  110,20 337.9 bottom
TET70  6  [TETRODE_128_0.5ID_0.7OD]  110,20 328.5 bottom
TET71  7  [TETRODE_128_0.5ID_0.7OD]  110,20 319.2 bottom
TET72  8  [TETRODE_128_0.5ID_0.7OD]  110,20 300.5 bottom
TET73  9  [TETRODE_128_0.5ID_0.7OD]  110,20 291.2 bottom
TET74  10  [TETRODE_128_0.5ID_0.7OD]  110,20 281.8 bottom
TET75  11  [TETRODE_128_0.5ID_0.7OD]  110,20 272.4 bottom
TET76  12  [TETRODE_128_0.5ID_0.7OD]  110,20 263.1 bottom
TET77  13  [TETRODE_128_0.5ID_0.7OD]  110,20 253.7 bottom
TET78  14  [TETRODE_128_0.5ID_0.7OD]  110,20 244.4 bottom
TET79  15  [TETRODE_128_0.5ID_0.7OD]  110,20 235 bottom
TET80  16  [TETRODE_128_0.5ID_0.7OD]  110,20 167 top
TET81  17  [TETRODE_128_0.5ID_0.7OD]  110,20 176.4 top
TET82  18  [TETRODE_128_0.5ID_0.7OD]  110,20 185.7 top
TET83  19  [TETRODE_128_0.5ID_0.7OD]  110,20 195.1 top
TET84  20  [TETRODE_128_0.5ID_0.7OD]  110,20 204.4 top
TET85  21  [TETRODE_128_0.5ID_0.7OD]  110,20 213.8 top
TET86  22  [TETRODE_128_0.5ID_0.7OD]  110,20 223.2 top
TET87  23  [TETRODE_128_0.5ID_0.7OD]  110,20 232.5 top
TET88  24  [TETRODE_128_0.5ID_0.7OD]  110,20 251.2 top
TET89  25  [TETRODE_128_0.5ID_0.7OD]  110,20 260.5 top
TET90  26  [TETRODE_128_0.5ID_0.7OD]  110,20 269.9 top
TET91  27  [TETRODE_128_0.5ID_0.7OD]  110,20 279.2 top
TET92  28  [TETRODE_128_0.5ID_0.7OD]  110,20 288.6 top
TET93  29  [TETRODE_128_0.5ID_0.7OD]  110,20 298 top
TET94  30  [TETRODE_128_0.5ID_0.7OD]  110,20 307.3 top
TET95  31  [TETRODE_128_0.5ID_0.7OD]  110,20 316.7 top
TET96  0  [TETRODE_128_0.5ID_0.7OD]  20,65 24.7 bottom
TET97  1  [TETRODE_128_0.5ID_0.7OD]  20,65 15.3 bottom
TET98  2  [TETRODE_128_0.5ID_0.7OD]  20,65 6 bottom
TET99  3  [TETRODE_128_0.5ID_0.7OD]  20,65 356.6 bottom
TET100  4  [TETRODE_128_0.5ID_0.7OD]  20,65 347.2 bottom
TET101  5  [TETRODE_128_0.5ID_0.7OD]  20,65 337.9 bottom
TET102  6  [TETRODE_128_0.5ID_0.7OD]  20,65 328.5 bottom
TET103  7  [TETRODE_128_0.5ID_0.7OD]  20,65 319.2 bottom
TET104  8  [TETRODE_128_0.5ID_0.7OD]  20,65 300.5 bottom
TET105  9  [TETRODE_128_0.5ID_0.7OD]  20,65 291.2 bottom
TET106  10  [TETRODE_128_0.5ID_0.7OD]  20,65 281.8 bottom
TET107  11  [TETRODE_128_0.5ID_0.7OD]  20,65 272.4 bottom
TET108  12  [TETRODE_128_0.5ID_0.7OD]  20,65 263.1 bottom
TET109  13  [TETRODE_128_0.5ID_0.7OD]  20,65 253.7 bottom
TET110  14  [TETRODE_128_0.5ID_0.7OD]  20,65 244.4 bottom
TET111  15  [TETRODE_128_0.5ID_0.7OD]  20,65 235 bottom
TET112  16  [TETRODE_128_0.5ID_0.7OD]  20,65 167 top
TET113  17  [TETRODE_128_0.5ID_0.7OD]  20,65 176.4 top
TET114  18  [TETRODE_128_0.5ID_0.7OD]  20,65 185.7 top
TET115  19  [TETRODE_128_0.5ID_0.7OD]  20,65 195.1 top
TET116  20  [TETRODE_128_0.5ID_0.7OD]  20,65 204.4 top
TET117  21  [TETRODE_128_0.5ID_0.7OD]  20,65 213.8 top
TET118  22  [TETRODE_128_0.5ID_0.7OD]  20,65 223.2 top
TET119  23  [TETRODE_128_0.5ID_0.7OD]  20,65 232.5 top
TET120  24  [TETRODE_128_0.5ID_0.7OD]  20,65 251.2 top
TET121  25  [TETRODE_128_0.5ID_0.7OD]  20,65 260.5 top
TET122  26  [TETRODE_128_0.5ID_0.7OD]  20,65 269.9 top
TET123  27  [TETRODE_128_0.5ID_0.7OD]  20,65 279.2 top
TET124  28  [TETRODE_128_0.5ID_0.7OD]  20,65 288.6 top
TET125  29  [TETRODE_128_0.5ID_0.7OD]  20,65 298 top
TET126  30  [TETRODE_128_0.5ID_0.7OD]  20,65 307.3 top
TET127  31  [TETRODE_128_0.5ID_0.7OD]  20,65 316.7 top
TET128  0  [TETRODE_128_0.5ID_0.7OD]  65,65 24.7 bottom
TET129  1  [TETRODE_128_0.5ID_0.7OD]  65,65 15.3 bottom
TET130  2  [TETRODE_128_0.5ID_0.7OD]  65,65 6 bottom
TET131  3  [TETRODE_128_0.5ID_0.7OD]  65,65 356.6 bottom
TET132  4  [TETRODE_128_0.5ID_0.7OD]  65,65 347.2 bottom
TET133  5  [TETRODE_128_0.5ID_0.7OD]  65,65 337.9 bottom
TET134  6  [TETRODE_128_0.5ID_0.7OD]  65,65 328.5 bottom
TET135  7  [TETRODE_128_0.5ID_0.7OD]  65,65 319.2 bottom
TET136  8  [TETRODE_128_0.5ID_0.7OD]  65,65 300.5 bottom
TET137  9  [TETRODE_128_0.5ID_0.7OD]  65,65 291.2 bottom
TET138  10  [TETRODE_128_0.5ID_0.7OD]  65,65 281.8 bottom
TET139  11  [TETRODE_128_0.5ID_0.7OD]  65,65 272.4 bottom
TET140  12  [TETRODE_128_0.5ID_0.7OD]  65,65 263.1 bottom
TET141  13  [TETRODE_128_0.5ID_0.7OD]  65,65 253.7 bottom
TET142  14  [TETRODE_128_0.5ID_0.7OD]  65,65 244.4 bottom
TET143  15  [TETRODE_128_0.5ID_0.7OD]  65,65 235 bottom
TET144  16  [TETRODE_128_0.5ID_0.7OD]  65,65 167 top
TET145  17  [TETRODE_128_0.5ID_0.7OD]  65,65 176.4 top
TET146  18  [TETRODE_128_0.5ID_0.7OD]  65,65 185.7 top
TET147  19  [TETRODE_128_0.5ID_0.7OD]  65,65 195.1 top
TET148  20  [TETRODE_128_0.5ID_0.7OD]  65,65 204.4 top
TET149  21  [TETRODE_128_0.5ID_0.7OD]  65,65 213.8 top
TET150  22  [TETRODE_128_0.5ID_0.7OD]  65,65 223.2 top
TET151  23  [TETRODE_128_0.5ID_0.7OD]  65,65 232.5 top
TET152  24  [TETRODE_128_0.5ID_0.7OD]  65,65 251.2 top
TET153  25  [TETRODE_128_0.5ID_0.7OD]  65,65 260.5 top
TET154  26  [TETRODE_128_0.5ID_0.7OD]  65,65 269.9 top
TET155  27  [TETRODE_128_0.5ID_0.7OD]  65,65 279.2 top
TET156  28  [TETRODE_128_0.5ID_0.7OD]  65,65 288.6 top
TET157  29  [TETRODE_128_0.5ID_0.7OD]  65,65 298 top
TET158  30  [TETRODE_128_0.5ID_0.7OD]  65,65 307.3 top
TET159  31  [TETRODE_128_0.5ID_0.7OD]  65,65 316.7 top
TET160  0  [TETRODE_128_0.5ID_0.7OD]  110,65 24.7 bottom
TET161  1  [TETRODE_128_0.5ID_0.7OD]  110,65 15.3 bottom
TET162  2  [TETRODE_128_0.5ID_0.7OD]  110,65 6 bottom
TET163  3  [TETRODE_128_0.5ID_0.7OD]  110,65 356.6 bottom
TET164  4  [TETRODE_128_0.5ID_0.7OD]  110,65 347.2 bottom
TET165  5  [TETRODE_128_0.5ID_0.7OD]  110,65 337.9 bottom
TET166  6  [TETRODE_128_0.5ID_0.7OD]  110,65 328.5 bottom
TET167  7  [TETRODE_128_0.5ID_0.7OD]  110,65 319.2 bottom
TET168  8  [TETRODE_128_0.5ID_0.7OD]  110,65 300.5 bottom
TET169  9  [TETRODE_128_0.5ID_0.7OD]  110,65 291.2 bottom
TET170  10  [TETRODE_128_0.5ID_0.7OD]  110,65 281.8 bottom
TET171  11  [TETRODE_128_0.5ID_0.7OD]  110,65 272.4 bottom
TET172  12  [TETRODE_128_0.5ID_0.7OD]  110,65 263.1 bottom
TET173  13  [TETRODE_128_0.5ID_0.7OD]  110,65 253.7 bottom
TET174  14  [TETRODE_128_0.5ID_0.7OD]  110,65 244.4 bottom
TET175  15  [TETRODE_128_0.5ID_0.7OD]  110,65 235 bottom
TET176  16  [TETRODE_128_0.5ID_0.7OD]  110,65 167 top
TET177  17  [TETRODE_128_0.5ID_0.7OD]  110,65 176.4 top
TET178  18  [TETRODE_128_0.5ID_0.7OD]  110,65 185.7 top
TET179  19  [TETRODE_128_0.5ID_0.7OD]  110,65 195.1 top
TET180  20  [TETRODE_128_0.5ID_0.7OD]  110,65 204.4 top
TET181  21  [TETRODE_128_0.5ID_0.7OD]  110,65 213.8 top
TET182  22  [TETRODE_128_0.5ID_0.7OD]  110,65 223.2 top
TET183  23  [TETRODE_128_0.5ID_0.7OD]  110,65 232.5 top
TET184  24  [TETRODE_128_0.5ID_0.7OD]  110,65 251.2 top
TET185  25  [TETRODE_128_0.5ID_0.7OD]  110,65 260.5 top
TET186  26  [TETRODE_128_0.5ID_0.7OD]  110,65 269.9 top
TET187  27  [TETRODE_128_0.5ID_0.7OD]  110,65 279.2 top
TET188  28  [TETRODE_128_0.5ID_0.7OD]  110,65 288.6 top
TET189  29  [TETRODE_128_0.5ID_0.7OD]  110,65 298 top
TET190  30  [TETRODE_128_0.5ID_0.7OD]  110,65 307.3 top
TET191  31  [TETRODE_128_0.5ID_0.7OD]  110,65 316.7 top
TET192  0  [TETRODE_128_0.5ID_0.7OD]  20,110 24.7 bottom
TET193  1  [TETRODE_128_0.5ID_0.7OD]  20,110 15.3 bottom
TET194  2  [TETRODE_128_0.5ID_0.7OD]  20,110 6 bottom
TET195  3  [TETRODE_128_0.5ID_0.7OD]  20,110 356.6 bottom
TET196  4  [TETRODE_128_0.5ID_0.7OD]  20,110 347.2 bottom
TET197  5  [TETRODE_128_0.5ID_0.7OD]  20,110 337.9 bottom
TET198  6  [TETRODE_128_0.5ID_0.7OD]  20,110 328.5 bottom
TET199  7  [TETRODE_128_0.5ID_0.7OD]  20,110 319.2 bottom
TET200  8  [TETRODE_128_0.5ID_0.7OD]  20,110 300.5 bottom
TET201  9  [TETRODE_128_0.5ID_0.7OD]  20,110 291.2 bottom
TET202  10  [TETRODE_128_0.5ID_0.7OD]  20,110 281.8 bottom
TET203  11  [TETRODE_128_0.5ID_0.7OD]  20,110 272.4 bottom
TET204  12  [TETRODE_128_0.5ID_0.7OD]  20,110 263.1 bottom
TET205  13  [TETRODE_128_0.5ID_0.7OD]  20,110 253.7 bottom
TET206  14  [TETRODE_128_0.5ID_0.7OD]  20,110 244.4 bottom
TET207  15  [TETRODE_128_0.5ID_0.7OD]  20,110 235 bottom
TET208  16  [TETRODE_128_0.5ID_0.7OD]  20,110 167 top
TET209  17  [TETRODE_128_0.5ID_0.7OD]  20,110 176.4 top
TET210  18  [TETRODE_128_0.5ID_0.7OD]  20,110 185.7 top
TET211  19  [TETRODE_128_0.5ID_0.7OD]  20,110 195.1 top
TET212  20  [TETRODE_128_0.5ID_0.7OD]  20,110 204.4 top
TET213  21  [TETRODE_128_0.5ID_0.7OD]  20,110 213.8 top
TET214  22  [TETRODE_128_0.5ID_0.7OD]  20,110 223.2 top
TET215  23  [TETRODE_128_0.5ID_0.7OD]  20,110 232.5 top
TET216  24  [TETRODE_128_0.5ID_0.7OD]  20,110 251.2 top
TET217  25  [TETRODE_128_0.5ID_0.7OD]  20,110 260.5 top
TET218  26  [TETRODE_128_0.5ID_0.7OD]  20,110 269.9 top
TET219  27  [TETRODE_128_0.5ID_0.7OD]  20,110 279.2 top
TET220  28  [TETRODE_128_0.5ID_0.7OD]  20,110 288.6 top
TET221  29  [TETRODE_128_0.5ID_0.7OD]  20,110 298 top
TET222  30  [TETRODE_128_0.5ID_0.7OD]  20,110 307.3 top
TET223  31  [TETRODE_128_0.5ID_0.7OD]  20,110 316.7 top
TET224  0  [TETRODE_128_0.5ID_0.7OD]  65,110 24.7 bottom
TET225  1  [TETRODE_128_0.5ID_0.7OD]  65,110 15.3 bottom
TET226  2  [TETRODE_128_0.5ID_0.7OD]  65,110 6 bottom
TET227  3  [TETRODE_128_0.5ID_0.7OD]  65,110 356.6 bottom
TET228  4  [TETRODE_128_0.5ID_0.7OD]  65,110 347.2 bottom
TET229  5  [TETRODE_128_0.5ID_0.7OD]  65,110 337.9 bottom
TET230  6  [TETRODE_128_0.5ID_0.7OD]  65,110 328.5 bottom
TET231  7  [TETRODE_128_0.5ID_0.7OD]  65,110 319.2 bottom
TET232  8  [TETRODE_128_0.5ID_0.7OD]  65,110 300.5 bottom
TET233  9  [TETRODE_128_0.5ID_0.7OD]  65,110 291.2 bottom
TET234  10  [TETRODE_128_0.5ID_0.7OD]  65,110 281.8 bottom
TET235  11  [TETRODE_128_0.5ID_0.7OD]  65,110 272.4 bottom
TET236  12  [TETRODE_128_0.5ID_0.7OD]  65,110 263.1 bottom
TET237  13  [TETRODE_128_0.5ID_0.7OD]  65,110 253.7 bottom
TET238  14  [TETRODE_128_0.5ID_0.7OD]  65,110 244.4 bottom
TET239  15  [TETRODE_128_0.5ID_0.7OD]  65,110 235 bottom
TET240  16  [TETRODE_128_0.5ID_0.7OD]  65,110 167 top
TET241  17  [TETRODE_128_0.5ID_0.7OD]  65,110 176.4 top
TET242  18  [TETRODE_128_0.5ID_0.7OD]  65,110 185.7 top
TET243  19  [TETRODE_128_0.5ID_0.7OD]  65,110 195.1 top
TET244  20  [TETRODE_128_0.5ID_0.7OD]  65,110 204.4 top
TET245  21  [TETRODE_128_0.5ID_0.7OD]  65,110 213.8 top
TET246  22  [TETRODE_128_0.5ID_0.7OD]  65,110 223.2 top
TET247  23  [TETRODE_128_0.5ID_0.7OD]  65,110 232.5 top
TET248  24  [TETRODE_128_0.5ID_0.7OD]  65,110 251.2 top
TET249  25  [TETRODE_128_0.5ID_0.7OD]  65,110 260.5 top
TET250  26  [TETRODE_128_0.5ID_0.7OD]  65,110 269.9 top
TET251  27  [TETRODE_128_0.5ID_0.7OD]  65,110 279.2 top
TET252  28  [TETRODE_128_0.5ID_0.7OD]  65,110 288.6 top
TET253  29  [TETRODE_128_0.5ID_0.7OD]  65,110 298 top
TET254  30  [TETRODE_128_0.5ID_0.7OD]  65,110 307.3 top
TET255  31  [TETRODE_128_0.5ID_0.7OD]  65,110 316.7 top
TET256  0  [TETRODE_128_0.5ID_0.7OD]  110,110 24.7 bottom
TET257  1  [TETRODE_128_0.5ID_0.7OD]  110,110 15.3 bottom
TET258  2  [TETRODE_128_0.5ID_0.7OD]  110,110 6 bottom
TET259  3  [TETRODE_128_0.5ID_0.7OD]  110,110 356.6 bottom
TET260  4  [TETRODE_128_0.5ID_0.7OD]  110,110 347.2 bottom
TET261  5  [TETRODE_128_0.5ID_0.7OD]  110,110 337.9 bottom
TET262  6  [TETRODE_128_0.5ID_0.7OD]  110,110 328.5 bottom
TET263  7  [TETRODE_128_0.5ID_0.7OD]  110,110 319.2 bottom
TET264  8  [TETRODE_128_0.5ID_0.7OD]  110,110 300.5 bottom
TET265  9  [TETRODE_128_0.5ID_0.7OD]  110,110 291.2 bottom
TET266  10  [TETRODE_128_0.5ID_0.7OD]  110,110 281.8 bottom
TET267  11  [TETRODE_128_0.5ID_0.7OD]  110,110 272.4 bottom
TET268  12  [TETRODE_128_0.5ID_0.7OD]  110,110 263.1 bottom
TET269  13  [TETRODE_128_0.5ID_0.7OD]  110,110 253.7 bottom
TET270  14  [TETRODE_128_0.5ID_0.7OD]  110,110 244.4 bottom
TET271  15  [TETRODE_128_0.5ID_0.7OD]  110,110 235 bottom
TET272  16  [TETRODE_128_0.5ID_0.7OD]  110,110 167 top
TET273  17  [TETRODE_128_0.5ID_0.7OD]  110,110 176.4 top
TET274  18  [TETRODE_128_0.5ID_0.7OD]  110,110 185.7 top
TET275  19  [TETRODE_128_0.5ID_0.7OD]  110,110 195.1 top
TET276  20  [TETRODE_128_0.5ID_0.7OD]  110,110 204.4 top
TET277  21  [TETRODE_128_0.5ID_0.7OD]  110,110 213.8 top
TET278  22  [TETRODE_128_0.5ID_0.7OD]  110,110 223.2 top
TET279  23  [TETRODE_128_0.5ID_0.7OD]  110,110 232.5 top
TET280  24  [TETRODE_128_0.5ID_0.7OD]  110,110 251.2 top
TET281  25  [TETRODE_128_0.5ID_0.7OD]  110,110 260.5 top
TET282  26  [TETRODE_128_0.5ID_0.7OD]  110,110 269.9 top
TET283  27  [TETRODE_128_0.5ID_0.7OD]  110,110 279.2 top
TET284  28  [TETRODE_128_0.5ID_0.7OD]  110,110 288.6 top
TET285  29  [TETRODE_128_0.5ID_0.7OD]  110,110 298 top
TET286  30  [TETRODE_128_0.5ID_0.7OD]  110,110 307.3 top
TET287  31  [TETRODE_128_0.5ID_0.7OD]  110,110 316.7 top
U$1  [EIB_MOUNT_A]  20,20 326 top
U$2  [EIB_MOUNT_A]  65,20 326 top
U$3  [EIB_MOUNT_A]  110,20 326 top
U$4  [EIB_MOUNT_A]  20,65 326 top
U$5  [EIB_MOUNT_A]  65,65 326 top
U$6  [EIB_MOUNT_A]  110,65 326 top
U$7  [EIB_MOUNT_A]  20,110 326 top
U$8  [EIB_MOUNT_A]  65,110 326 top
U$9  [EIB_MOUNT_A]  110,110 326 top

## Library data of the parts
AGND_A0 AGND_A1-AGND_A17 AGND_B0 AGND_B1-AGND_B17 AIN_N0T AIN_N0T1-AIN_N0T8 AIN_S0T AIN_S0T1-AIN_S0T8 MECH_E0T MECH_E0T1-MECH_E0T8 MECH_W0T MECH_W0T1-MECH_W0T8 REF_A0 REF_A1-REF_A17 REF_B0 REF_B1-REF_B17 SHLD_A0 SHLD_A1-SHLD_A17 SHLD_B0 SHLD_B1-SHLD_B17 SJ_A0 SJ_A1-SJ_A17 SJ_B0 SJ_B1-SJ_B17 TET0 TET1-TET287 U$1-U$9 = jonnew